# Altium PCB ov_ftdi.PcbDoc (part 2 of 3)
Units mm, origin at the board's own origin, x right, y up, seen from the top; angles counter-clockwise.
Board outline 70.64 x 125.22 mm, 4 copper layers (Top Layer, Ground, Power, Bottom Layer), stack 1.565 mm thick; 150 components, 161 nets, 670 pads, 245 vias.
Unrouted connection lines stored in the file: 2.
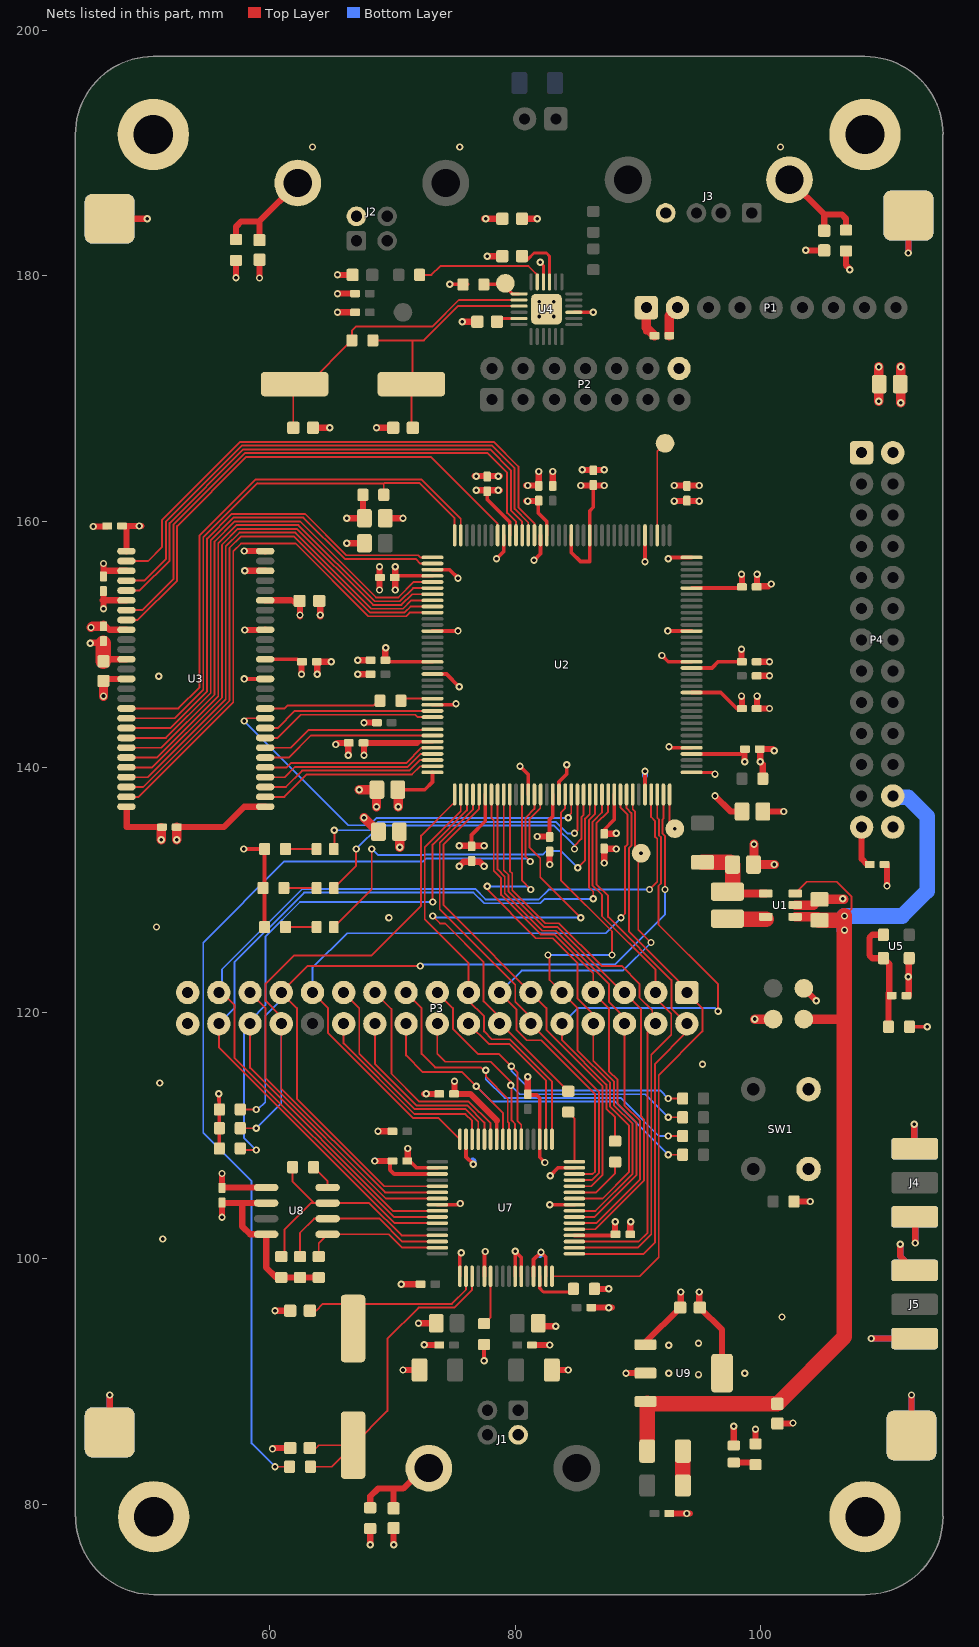
[diagram p4: the nets of this part, all layers, seen from the top]

## Via types
v1: diameter 0.6, hole 0.3, Top Layer to Bottom Layer, 245 vias

## Nets (pads, with @x,y where several pads share a name; then routed paths per layer and width w, separated by ;. In a path a pad name is that pad's centre, name@x,y a point inside that pad or via, vN(x,y) a via of type N, cw(c..) or ccw(c..) an arc to the next point about the centre after c; other vN are vias at no path point) (continued)
+3.3V: C2.2 C4.2 C5.2 C6.2 C7.2 C14.2 C15.2 C17.2 C18.1 C22.2 C23.2 C24.2 C25.2 C26.2 C27.2 C28.2 C31.2 C32.2 C33.2 C34.2 C35.2 C37.2 C38.2 C39.2 C40.2 C42.2 C43.2 C49.2 C51.2 C55.2 C56.2 C57.2 C58.2 C59.2 L3.1 L4.1 P1.1 P4.25 P4.26 R1.1 R6.2 R7.2 R8.2 R9.2 R10.2 R11.2 R12.2 R13.2 R16.1 R18.2 R19.1 R20.1 TP1.1 U2.4 U2.18 U2.20 U2.31 U2.36 U2.42 U2.53 U2.63 U2.76 U2.86 U2.90 U2.103 U2.122 U2.125 U2.129 U2.135 U3.1 U3.3 U3.9 U3.14 U3.27 U3.43 U3.49 U4.9 U4.16 U7.20 U7.31 U7.42 U7.50 U7.56 U8.6 U8.8 U9.2 U9.4 | length 194.1
  Top Layer w0.152: v1(82.042,181.102) 82.3,180.844
  Top Layer w0.254: U4.16@82.3,179.517 82.3,180.844 ; U4.9@84.775,177.042 86.356,177.042 v1(86.36,177.038)
  Top Layer w0.305: C22.2@48.196,159.639 C22.2@48.35,159.485 ; U3.27@48.35,136.793 U3.27@48.374,136.769 ; v1(55.88,113.411) R18.2@55.919,112.141 R19.1@55.919,110.617 R20.1@55.919,108.966 ; v1(57.912,133.35) R6.2@59.602,133.35 R8.2@59.602,127 ; U3.43@59.65,148.793 62.243,148.793 C28.2@62.446,148.59 ; 61.761,153.593 61.938,153.416 ; C31.2@69.434,148.717 69.565,148.586 U2.18@73.27,148.586 ; C5.2@70.446,138.176 72.644,138.176 73.27,138.802 U2.36@73.27,139.586 ; C38.2@70.485,155.586 U2.4@73.27,155.586 ; C57.2@71.412,107.95 71.972,107.39 U7.50@73.673,107.39 ; 72.109,142.086 U2.31@73.27,142.086 ; U2.20@73.27,147.586 74.41,147.586 v1(75.438,146.558) ; U7.56@73.673,104.39 75.434,104.39 v1(75.527,104.483) ; C25.2@76.454,133.569 76.454,133.604 76.454,134.493 77.57,135.609 U2.42@77.57,137.786 ; C34.2@77.724,162.468 77.724,161.798 79.57,159.952 U2.135@79.57,158.886 ; U7.42@78.498,109.715 78.498,111.252 ; C23.2@81.915,161.706 81.88,161.671 81.88,160.69 82.57,160 U2.129@82.57,158.886 ; C32.2@82.769,134.366 C32.2@82.804,134.331 82.804,135.751 83.07,136.017 U2.53@83.07,137.786 ; v1@82.838,106.738 83.49,107.39 U7.31@84.823,107.39 ; U2.125@84.57,158.886 84.57,157.492 85.308,156.754 86.07,156.754 U2.122@86.07,158.886 86.07,160.873 86.36,161.163 86.36,162.941 C59.2@86.36,162.976 ; U7.20@84.823,101.89 C55.2@87.882,101.89 ; C24.2@87.249,134.585 87.249,134.921 88.07,135.742 U2.63@88.07,137.786 ; C55.2@88.073,102.081 C55.2@88.1,102.108 ; U2.90@94.366,148.082 U2.90@94.37,148.086 96.016,148.086 96.52,148.59 C35.2@98.26,148.59 ; U2.76@94.37,141.086 98.322,141.086 98.679,141.443 C42.2@98.714,141.478 ; U2.86@94.37,146.086 96.738,146.086 98.044,144.78 C49.2@98.46,144.78 ; U2.103@94.37,154.586 98.16,154.586 C27.2@98.26,154.686 ; R1.1@112.102,118.872 v1(113.538,118.872)
  Top Layer w0.508: C40.2@46.482,151.676 46.965,151.193 U3.9@48.35,151.193 ; C39.2@46.482,155.54 C39.2@46.482,155.74 ; v1(46.482,156.591) C39.2@46.482,155.74 ; C15.2@46.736,147.193 U3.14@48.35,147.193 ; C22.2@48.196,159.639 v1(49.403,159.639) v1@49.555,159.639 ; U3.3@48.35,155.993 46.735,155.993 C39.2@46.482,155.74 ; U3.1@48.35,157.593 C22.2@48.35,159.485 ; U3.27@48.374,136.769 48.374,135.128 C37.2@51.041,135.128 ; v1(56.134,103.378) C58.2@56.134,104.356 ; C58.2@56.134,104.556 C58.2@56.134,104.356 ; U8.6@59.301,104.521 57.785,104.521 ; U3.49@59.65,153.593 61.761,153.593 ; C14.2@62.446,153.543 62.484,153.505 v1(62.484,152.4) v1@62.484,152.273 ; v1(62.611,147.574) 62.611,148.555 C28.2@62.646,148.59 ; R13.2@64.008,98.464 R12.2@62.484,98.464 R11.2@60.96,98.464 60.54,98.464 59.73,99.274 U8.8@59.73,101.981 58.42,101.981 57.785,102.616 57.785,104.521 ; v1(67.691,140.97) 67.691,141.951 C33.2@67.656,141.986 72.009,141.986 ; C31.2@69.434,148.717 69.434,149.698 v1(69.469,149.733) ; C7.2@69.58,160.274 v1(70.866,160.274) ; v1(70.231,154.432) v1(70.231,156.337) ; C5.2@70.446,138.176 C5.2@70.485,138.137 ; C6.2@70.573,134.747 C6.2@70.612,134.708 ; v1(70.866,90.932) L4.1@72.21,90.932 ; C57.2@71.212,107.95 71.247,107.985 v1(71.247,108.966) ; C56.2@75.022,113.411 75.057,113.446 v1(75.057,114.427) ; C56.2@75.222,113.411 76.339,113.411 78.498,111.252 ; v1(75.438,133.604) 76.454,133.604 v1(77.47,133.604) ; v1(75.527,104.483) v1@75.565,104.521 ; v1(76.835,162.56) v1(78.613,162.56) v1@78.74,162.56 ; C18.1@80.556,184.658 v1(81.788,184.658) ; v1@80.899,161.671 v1(81.026,161.671) C23.2@81.88,161.671 ; v1(81.788,134.366) C32.2@82.769,134.366 ; L3.1@82.984,90.932 v1(84.328,90.932) ; v1(85.344,162.941) 86.36,162.941 v1(87.249,162.941) ; R16.1@86.448,97.536 v1(87.63,97.536) ; C24.2@87.249,134.585 88.205,134.585 v1(88.24,134.62) ; v1(88.138,102.997) 88.138,102.016 C55.2@88.173,101.981 ; v1(89.027,90.678) U9.2@90.608,90.678 ; 90.678,175.476 90.678,175.803 ; v1(92.964,161.671) v1(94.996,161.671) ; v1(94.996,97.282) 94.996,96.05 C17.2@95.034,96.012 96.844,94.202 U9.4@96.844,90.678 ; v1(96.266,137.668) 97.536,136.398 C4.2@98.464,136.398 ; v1(98.425,145.796) 98.46,145.761 C49.2@98.46,144.78 ; v1(98.425,149.606) 98.425,148.625 C35.2@98.46,148.59 ; v1(98.425,155.702) 98.46,155.667 C27.2@98.46,154.686 ; v1(98.679,140.462) C42.2@98.679,141.443 ; R9.2@99.568,84.924 v1(99.568,86.106) ; R10.2@102.704,104.648 v1(104.013,104.648) ; TP1.1@103.5,122 v1(104.5,121) ; P4.25@108.204,135.128 108.204,132.55 C26.2@108.674,132.08 ; C58.2@56.134,104.356 56.299,104.521 57.785,104.521
  Top Layer w0.762: v1(45.466,151.384) 45.558,151.476 C40.2@46.482,151.476 ; v1(46.482,145.796) C15.2@46.482,147.028 ; v1(51.181,134.112) C37.2@51.181,135.068 ; v1(70.485,136.779) C5.2@70.485,138.137 ; v1(70.612,133.477) C6.2@70.612,134.708 ; P1.1@90.678,177.419 90.678,175.803 C43.2@91.348,175.133 ; v1(109.601,169.799) v1(109.601,172.593)
  other v1: 94.925,90.56 92.5,90.664 98.679,90.678 92.5,92.95 94.925,93.1 82.85,106.75
+5V: C10.2 C16.2 L2.1 P4.24 TP3.1 U1.1 U1.3 U9.3 | length 89.4
  Top Layer w0.152: U1.3@102.8,129.728 103.755,130.683 106.194,130.683 107.378,129.5 107.378,128.46 v1(106.807,127.889)
  Top Layer w0.508: U9.3@90.608,88.367 U9.3@90.752,88.223
  Top Layer w0.762: U1.1@102.8,127.828 C10.2@104.675,127.828 ; TP3.1@103.5,119.5 106.807,119.5
  Top Layer w1.27: L2.1@90.752,84.328 U9.3@90.752,88.223 ; U9.3@90.799,88.176 C16.2@101.346,88.176 106.807,93.637 106.807,119.5 v1(106.807,126.746) v1(106.807,127.889) 106.465,127.547 C10.2@104.775,127.547
  Bottom Layer w1.27: v1(106.807,126.746) v1(106.807,127.889) ; v1@106.934,127.889 111.506,127.889 113.538,129.921 113.538,136.012 112.003,137.547 110.865,137.547 P4.24@110.744,137.668
ACBUS0: P3.9 U2.55 U7.26 | length 45.8
  Top Layer w0.152: v1@82.804,124.714 82.804,122.682 P3.9@83.82,121.666 85.09,120.396 85.09,116.94 87.732,114.299 87.732,112.367 89.256,110.843 89.256,107.036 87.11,104.89 U7.26@84.823,104.89 ; U2.55@84.07,137.786 84.07,136.648 83.718,136.296 83.718,130.811 87.884,126.646 v1(87.884,124.714)
  Bottom Layer w0.152: v1(82.677,124.714) v1(87.884,124.714)
ACBUS2: P3.11 U2.41 U7.28 | length 40.2
  Top Layer w0.152: U2.41@77.07,137.786 77.07,136.633 74.168,133.731 74.168,128.778 82.55,120.396 82.55,118.618 87.122,114.046 87.122,106.834 86.178,105.89 U7.28@84.823,105.89
ACBUS3: P3.12 U2.40 U7.29 | length 39.5
  Top Layer w0.152: U2.40@76.57,137.786 76.57,136.564 73.863,133.857 73.863,128.437 80.01,122.29 80.01,120.904 81.28,119.634 P3.12@81.28,119.126 86.817,113.589 86.817,106.96 86.247,106.39 U7.29@84.823,106.39
ACBUS4: P3.13 TP15.1 U2.66 U7.30 | length 47.1
  Top Layer w0.152: P3.13@78.74,121.666 80.101,120.305 80.101,118.624 80.946,117.779 82.119,117.779 86.512,113.386 86.512,107.086 86.316,106.89 U7.30@84.823,106.89 ; U2.66@89.57,137.786 89.57,136.59 89.764,136.397 89.764,133.486 v1(90.25,133) 90.018,132.768 90.018,126.771 v1(91.059,125.73)
  Bottom Layer w0.152: P3.13@78.74,121.666 80.518,123.444 88.773,123.444 v1(91.059,125.73)
ACBUS6: P3.15 U2.38 U7.33 | length 34.4
  Top Layer w0.152: U2.38@75.57,137.786 75.57,136.426 72.644,133.5 72.644,127.635 76.2,124.079 P3.15@76.2,121.666 76.2,120.992 77.47,119.722 77.47,118.491 78.105,117.856 79.579,117.856 82.998,114.437 U7.33@82.998,109.715
ACBUS7: P3.16 U7.34 | length 13
  Top Layer w0.152: P3.16@76.2,119.126 77.851,117.475 79.529,117.475 82.498,114.506 U7.34@82.498,109.715
BCBUS4: P3.29 U7.55 | length 25.5
  Top Layer w0.152: P3.29@58.42,121.666 59.69,120.396 59.69,114.685 69.485,104.89 U7.55@73.673,104.89
BDBUS4: P3.21 U7.43 | length 18.2
  Top Layer w0.152: P3.21@68.58,121.666 69.933,120.313 69.933,115.054 72.211,112.776 76.223,112.776 77.998,111.001 U7.43@77.998,109.715
BDBUS5: P3.22 U7.44 | length 15.5
  Top Layer w0.152: P3.22@68.58,119.126 68.58,115.847 71.956,112.471 76.097,112.471 77.498,111.07 U7.44@77.498,109.715
BDBUS6: P3.23 U7.45 | length 18.9
  Top Layer w0.152: P3.23@66.04,121.666 67.31,120.396 67.31,116.686 71.83,112.166 75.971,112.166 76.998,111.139 U7.45@76.998,109.715
BDBUS7: P3.24 U7.46 | length 16.2
  Top Layer w0.152: P3.24@66.04,119.126 66.04,117.525 71.805,111.76 75.946,111.76 76.498,111.208 U7.46@76.498,109.715
CCLK: P3.10 R22.2 U2.70 | length 44.3
  Top Layer w0.152: P3.10@83.82,119.126 83.82,117.779 87.427,114.172 87.427,112.217 88.138,111.506 R22.2@88.138,109.816 ; U2.70@91.57,137.786 91.57,135.884 91.705,135.749 91.705,134.463 91.875,134.293 91.875,130.56 91.669,130.354 91.669,127.193 96.52,122.341 v1(96.52,120.142)
  Bottom Layer w0.152: P3.10@83.82,119.126 85.09,120.396 96.266,120.396 v1(96.52,120.142)
CLKOUT: P3.14 R23.2 U2.51 | length 43.4
  Top Layer w0.152: v1(73.279,127.889) 73.887,127.281 74.295,127.281 77.433,124.143 77.433,120.941 78.74,119.634 P3.14@78.74,119.126 78.828,119.126 R23.2@84.328,113.626 ; U2.51@82.042,137.786 82.042,136.652 81.153,135.763 81.153,133.477 82.042,132.588 82.042,131.064 v1(85.344,127.762)
  Bottom Layer w0.152: v1(73.279,127.889) 73.406,127.762 v1(85.344,127.762)
CSI_B: P3.25 U2.64 U7.48 | length 57.5
  Top Layer w0.152: P3.25@63.5,121.666 64.77,120.396 64.77,118.364 71.679,111.455 73.758,111.455 U7.48@75.498,109.715 ; U2.64@88.57,137.786 88.57,136.728 89.154,136.144 89.154,133.736 88.955,133.537 88.955,128.096 v1(88.621,127.762)
  Bottom Layer w0.152: P3.25@63.5,121.666 63.5,123.675 66.317,126.492 87.376,126.492 88.621,127.737 v1(88.621,127.762)
D0: P3.1 U2.65 U7.16 | length 51.2
  Top Layer w0.152: U7.16@82.998,98.565 90.157,98.565 91.694,100.102 91.694,114.935 95.25,118.491 95.25,120.396 P3.1@93.98,121.666 93.98,121.92 89.259,126.641 89.259,133.41 89.459,133.61 89.459,136.27 89.07,136.659 U2.65@89.07,137.786
D1: P3.2 U2.62 U7.17 | length 47.9
  Top Layer w0.152: U7.17@84.823,100.39 90.457,100.39 91.389,101.322 91.389,115.861 93.98,118.452 P3.2@93.98,119.126 93.976,119.126 92.723,120.379 92.723,122.669 87.57,127.822 87.57,129.54 86.614,130.496 86.614,135.442 87.57,136.398 U2.62@87.57,137.786
D2: P3.3 U2.61 U7.18 | length 46.2
  Top Layer w0.152: U7.18@84.823,100.89 89.982,100.89 91.084,101.992 91.084,116.584 92.71,118.21 92.71,119.923 91.44,121.193 91.44,123.521 87.07,127.891 87.07,129.609 86.309,130.37 86.309,135.568 87.07,136.329 U2.61@87.07,137.786
D3: P3.4 U2.46 U7.19 | length 48.7
  Top Layer w0.152: U2.46@79.57,137.786 79.57,131.55 79.765,131.355 79.765,129.989 82.449,127.305 83.562,127.305 87.041,123.825 88.673,123.825 90.119,122.379 90.119,121.256 91.164,120.211 91.164,119.402 P3.4@91.44,119.126 90.78,118.466 90.78,102.118 90.041,101.379 U7.19@84.834,101.379
D4: P3.5 U2.45 U7.21 | length 44.2
  Top Layer w0.152: U2.45@79.07,137.786 79.07,131.619 79.46,131.229 79.46,129.862 82.323,127 83.435,127 88.769,121.666 P3.5@88.9,121.666 90.25,120.316 90.25,111.572 90.475,111.348 90.475,106.35 86.515,102.39 U7.21@84.823,102.39
D5: P3.6 U2.44 U7.22 | length 43.6
  Top Layer w0.152: U2.44@78.57,137.786 78.57,131.688 79.156,131.103 79.156,129.736 82.197,126.695 83.309,126.695 87.63,122.374 87.63,120.904 88.9,119.634 P3.6@88.9,119.126 88.9,112.491 90.17,111.221 90.17,106.476 86.584,102.89 U7.22@84.823,102.89
D6: P3.7 U2.43 U7.23 | length 43
  Top Layer w0.152: U2.43@78.07,137.786 78.07,135.89 78.255,135.705 78.255,131.572 78.851,130.976 78.851,129.61 82.07,126.39 83.183,126.39 86.36,123.213 P3.7@86.36,121.666 87.63,120.396 87.63,115.262 88.341,114.551 88.341,112.619 89.865,111.095 89.865,106.783 86.472,103.39 U7.23@84.823,103.39
D7: P3.8 U2.48 U7.24 | length 47.1
  Top Layer w0.152: v1@77.47,130.302 77.597,130.175 81.686,126.086 83.057,126.086 85.09,124.052 85.09,121.158 86.36,119.888 P3.8@86.36,119.126 86.36,116.101 88.036,114.425 88.036,112.493 89.56,110.969 89.56,106.909 86.541,103.89 U7.24@84.823,103.89 ; v1@77.597,130.429 v1@77.724,130.556 ; U2.48@80.57,137.786 80.543,137.759 80.543,130.785 v1(81.28,130.048)
  Bottom Layer w0.152: v1(77.724,130.302) 81.026,130.302 v1(81.28,130.048)
DONE: P3.27 R18.1 U2.71 U7.53 | length 78.9
  Top Layer w0.152: R18.1@57.619,112.141 v1@58.674,112.141 ; v1(72.263,123.825) 63.119,123.825 P3.27@60.96,121.666 62.23,120.396 62.23,113.007 69.347,105.89 U7.53@73.673,105.89 ; U2.71@92.07,137.786 92.07,135.809 92.009,135.748 92.009,134.59 92.202,134.397 v1(92.202,130.048)
  Bottom Layer w0.152: v1(58.928,112.141) 59.055,112.141 59.656,112.742 59.656,119.78 60.96,121.083 P3.27@60.96,121.666 ; v1@72.136,123.952 88.138,123.952 92.202,128.016 v1(92.202,130.048)
EECLK: R12.1 U7.62 U8.2 | length 14.4
  Top Layer w0.152: R12.1@62.484,100.164 62.484,102.108 63.627,103.251 U8.2@64.73,103.251 68.961,103.251 70.822,101.39 U7.62@73.673,101.39
EECS: R13.1 U7.63 U8.1 | length 11.5
  Top Layer w0.152: R13.1@64.008,100.164 64.008,101.259 U8.1@64.73,101.981 69.723,101.981 70.814,100.89 U7.63@73.673,100.89
EEDATA: R11.1 R17.2 U7.61 U8.3 | length 20.3
  Top Layer w0.152: R11.1@61.214,100.164 61.214,102.362 63.373,104.521 63.627,104.521 ; R17.2@61.888,107.442 61.888,106.26 63.627,104.521 ; U7.61@73.673,101.89 70.753,101.89 68.122,104.521 U8.3@64.73,104.521 63.627,104.521
FTDI_TCK: NT2.1 P3.17 U7.38 | length 31
  Top Layer w0.152: P3.17@73.66,121.666 74.93,120.396 74.93,118.718 76.998,116.65 78.707,116.65 v1(79.695,115.662) 80.183,115.173 80.183,111.206 80.498,110.891 U7.38@80.498,109.715 ; v1(92.456,113.03) NT2.1@93.638,113.03
  Bottom Layer w0.152: v1(79.695,115.662) 79.695,115.277 81.281,113.69 91.796,113.69 v1(92.456,113.03)
FTDI_TDI: NT3.1 P3.18 U7.39 | length 29.3
  Top Layer w0.152: P3.18@73.66,119.126 73.66,116.688 74.323,116.025 78.031,116.025 78.638,115.418 79.248,114.808 79.65,114.406 v1(79.65,114.1) 79.705,114.045 79.705,111.253 79.998,110.96 U7.39@79.998,109.715 ; v1(92.456,111.506) NT3.1@93.638,111.506
  Bottom Layer w0.152: v1(79.65,114.1) 80.364,113.386 90.576,113.386 v1(92.456,111.506)
FTDI_TDO: NT4.1 P3.19 U7.40 | length 36.4
  Top Layer w0.152: P3.19@71.12,121.666 72.39,120.396 72.39,116.663 73.483,115.57 77.216,115.57 77.452,115.334 v1(77.606,115.334) 77.631,115.309 77.631,114.801 79.4,113.031 79.4,111.125 79.498,111.027 U7.40@79.498,109.715 ; v1(92.456,109.982) NT4.1@93.638,109.982
  Bottom Layer w0.152: v1(77.606,115.334) 77.606,114.619 79.144,113.081 88.595,113.081 91.694,109.982 v1(92.456,109.982)
FTDI_TMS: NT5.1 P3.20 U7.41 | length 33.6
  Top Layer w0.152: P3.20@71.12,119.126 71.12,116.549 72.48,115.189 75.675,115.189 v1(76.843,114.021) 78.998,111.866 U7.41@78.998,109.715 ; v1(92.456,108.458) NT5.1@93.638,108.458
  Bottom Layer w0.152: v1(76.843,114.021) 78.088,112.776 88.138,112.776 v1(92.456,108.458)
GND: C1.1 C2.1 C3.1 C4.1 C5.1 C6.1 C7.1 C8.1 C9.1 C10.1 C11.2 C12.2 C13.1 C14.1 C15.1 C16.1 C17.1 C18.2 C19.1 C20.1 C21.1 C22.1 C23.1 C24.1 C25.1 C26.1 C27.1 C28.1 C29.1 C30.1 C31.1 C32.1 C33.1 C34.1 C35.1 C36.1 C37.1 C38.1 C39.1 C40.1 C41.1 C42.1 C43.1 C44.1 C45.2 C46.1 C47.1 C48.1 C49.1 C50.1 C51.1 C52.1 C53.1 C54.1 C55.1 C56.1 C57.1 C58.1 C59.1 C60.1 C61.1 C62.1 C63.1 C64.1 H1.1@50.546,191.516 H2.1@108.483,191.516 H3.1@108.483,78.994 H4.1@50.571,78.994 J1.4 J2.4 J3.4 J4.2 J4.3 J4.4 J4.5 J5.2 J5.3 J5.4 J5.5 LD4.C P1.2 P2.14 P3.33 P3.34 P4.1 P4.2 R2.1 R15.2 R21.1 R25.2 R27.2 R28.2 R29.2 SW1.3 SW1.4 TP4.1 TP5.1 TP6.1 TP7.1 TP8.1 TP9.1 TP10.1 TP11.1 TP12.1 U1.2 U2.3 U2.13 U2.25 U2.49 U2.54 U2.68 U2.73 U2.77 U2.91 U2.96 U2.108 U2.113 U2.130 U2.136 U3.6 U3.12 U3.28 U3.41 U3.46 U3.52 U3.54 U4.25 U5.2 U7.1 U7.5 U7.10 U7.11 U7.13 U7.15 U7.25 U7.35 U7.47 U7.51 U8.5 U9.1 | length 246
  Top Layer w0.152: U4.25@82.55,178.054 U4.25@83.3,177.304
  Top Layer w0.254: U2.73@94.37,139.586 96.126,139.586 v1(96.266,139.446)
  Top Layer w0.305: v1(57.937,147.193) U3.41@59.65,147.193 ; C57.1@69.812,107.95 69.812,107.226 70.148,106.89 U7.51@73.673,106.89 ; U2.25@73.27,145.086 75.109,145.086 v1(75.184,145.161) ; U2.13@73.27,151.086 73.284,151.1 v1(75.35,151.1) ; U2.3@73.27,156.086 74.664,156.086 v1(75.35,155.4) ; v1(74.676,179.324) R2.1@76.112,179.324 ; U7.1@75.498,98.565 75.498,100.293 75.6,100.395 v1(75.6,100.475) ; U7.47@75.998,109.715 75.998,108.277 v1(76.6,107.675) ; v1(77.47,91.694) R15.2@77.47,93.003 ; U7.5@77.498,98.565 77.498,100.498 v1(77.575,100.575) ; v1(78.486,156.972) 79.07,157.556 U2.136@79.07,158.886 ; U7.10@79.998,98.565 80,98.567 v1(80,100.6) 80.498,100.102 U7.11@80.498,98.565 ; v1(80.391,140.081) 81.07,139.402 U2.49@81.07,137.786 ; C54.1@81.28,113.322 81.75,113.322 81.998,113.074 U7.35@81.998,109.715 81.998,108.248 v1(82.423,107.823) ; U7.13@81.498,98.565 81.498,99.923 v1(82.1,100.525) 82.498,100.127 U7.15@82.498,98.565 ; v1(81.534,156.845) 82.07,157.381 U2.130@82.07,158.886 ; v1(82.808,104.39) U7.25@84.823,104.39 ; U2.54@83.57,137.786 83.57,138.815 84.201,139.446 v1(84.201,140.208) ; U2.68@90.57,137.786 v1(90.57,139.681) ; v1(90.57,156.737) U2.113@90.57,158.886 ; v1(91.948,149.098) 92.46,148.586 U2.91@94.37,148.586 ; v1(92.425,151.1) 94.356,151.1 U2.96@94.37,151.086 ; v1(92.456,156.972) 92.57,157.086 U2.108@94.37,157.086 ; v1(92.525,141.675) 92.605,141.675 92.694,141.586 U2.77@94.37,141.586 ; U5.2@112.052,124.43 U5.2@112.082,124.46
  Top Layer w0.508: v1@45.43,150.13 46.436,150.13 46.482,150.176 C40.1@46.482,150.276 ; v1(45.65,159.6) 46.757,159.6 C22.1@46.796,159.639 ; 46.419,153.593 46.482,153.593 ; C15.1@46.482,148.793 U3.12@48.35,148.793 ; v1(46.482,152.908) 46.482,153.593 ; C39.1@46.482,154.14 46.482,153.593 ; TP5.1@46.99,85.852 v1(46.99,88.9) ; TP6.1@46.99,184.658 v1(50.038,184.658) ; U3.6@48.35,153.593 46.482,153.593 ; C37.1@52.641,135.128 56.286,135.128 57.951,136.793 U3.28@59.65,136.793 ; C58.1@56.134,105.756 v1(56.134,106.934) ; C58.1@56.299,105.791 U8.5@59.73,105.791 ; v1(57.277,179.857) R27.2@57.277,181.343 ; v1(57.937,157.607) U3.54@59.65,157.593 ; v1(57.974,155.993) U3.52@59.65,155.993 ; v1(57.975,151.175) 59.632,151.175 U3.46@59.65,151.193 ; v1(59.182,179.832) C44.1@59.182,181.318 ; v1(60.25,84.507) 60.319,84.507 60.394,84.582 C61.1@61.684,84.582 ; v1(60.452,95.758) C60.1@61.684,95.758 ; C63.1@63.538,167.64 v1(64.897,167.64) ; C28.1@63.846,148.59 63.881,148.555 v1(63.881,147.574) ; C28.1@64.046,148.59 v1(65.024,148.59) ; v1@64.135,152.273 v1(64.135,152.4) C14.1@64.135,153.378 ; v1(65.405,141.859) 65.532,141.986 C33.1@66.456,141.986 66.421,141.951 v1(66.421,140.97) ; v1(65.532,177.038) C45.2@66.764,177.038 ; v1(65.532,178.562) C41.1@66.764,178.562 ; v1(65.532,180.086) C13.1@66.764,180.086 ; v1(66.294,158.242) C3.1@67.58,158.242 ; v1(66.294,160.274) C7.1@67.58,160.274 ; v1(67.183,148.717) C31.1@68.234,148.717 ; v1@67.31,147.574 C20.1@68.234,147.574 C20.1@68.288,147.574 ; R21.1@67.603,162.179 67.603,160.401 C7.1@67.73,160.274 ; v1(67.691,143.637) C21.1@68.742,143.637 C21.1@68.923,143.637 ; v1(68.199,76.708) R29.2@68.199,78.017 ; v1(68.58,107.95) C57.1@69.812,107.95 ; C5.1@68.707,138.137 C5.1@68.746,138.176 ; v1(68.707,167.64) C62.1@70.066,167.64 ; v1(68.834,110.363) C53.1@70.012,110.363 ; C6.1@68.834,134.747 C6.1@68.873,134.747 ; v1(68.961,154.432) v1(68.961,156.337) ; v1(70.104,76.708) C64.1@70.104,78.067 ; v1(70.739,97.917) C36.1@72.098,97.917 ; v1@72.39,94.742 C9.1@73.572,94.742 C9.1@73.622,94.742 ; v1@72.59,113.411 v1(72.771,113.411) C56.1@73.822,113.411 ; v1(72.6,92.975) 73.611,92.975 C47.1@73.622,92.964 ; v1(75.438,131.953) 75.8,132.315 76.408,132.315 C25.1@76.454,132.361 ; v1(75.692,176.276) C11.2@76.924,176.276 ; v1@76.708,163.703 v1(76.835,163.703) v1(78.613,163.703) v1@78.74,163.703 ; v1(77.47,131.953) 77.108,132.315 76.5,132.315 C25.1@76.454,132.361 ; v1@77.47,184.658 v1(77.597,184.658) C18.2@78.956,184.658 ; v1(77.724,181.61) C12.2@78.956,181.61 ; v1@80.899,162.941 v1(81.026,162.941) 81.88,162.941 C23.1@81.915,162.906 v1(81.915,164.084) ; C54.1@81.026,113.576 v1(81.026,114.808) ; C50.1@81.572,92.964 v1(82.804,92.964) ; C8.1@81.572,94.488 v1@83.058,94.488 ; v1(82.804,132.08) C32.1@82.804,133.131 ; C19.1@83.058,163.106 v1(83.058,164.084) ; v1(85.471,164.211) v1(87.249,164.211) ; C52.1@86.398,96.012 v1(87.63,96.012) v1@87.884,96.012 ; v1(87.249,132.207) C24.1@87.249,133.385 87.267,133.368 88.222,133.368 v1(88.24,133.35) ; C55.1@89.373,101.981 89.373,102.962 v1(89.408,102.997) ; U9.1@90.608,92.989 90.608,93.186 C17.1@93.434,96.012 93.472,96.05 v1(93.472,97.282) ; C46.1@92.748,79.248 v1(93.98,79.248) v1@94.234,79.248 ; v1(92.964,162.941) v1(94.996,162.941) ; v1(97.79,86.36) 97.8,86.35 LD4.C@97.8,84.794 ; C29.1@99.66,147.447 v1(100.711,147.447) ; C35.1@99.66,148.59 v1(100.711,148.59) ; C27.1@99.66,154.686 99.695,154.721 v1(99.695,155.702) ; v1(99.695,145.796) 99.695,144.815 C49.1@99.66,144.78 v1(100.711,144.78) ; C27.1@99.806,154.686 99.806,154.732 100.608,154.732 100.793,154.917 v1(100.861,154.917) ; C4.1@100.164,136.398 v1(101.854,136.398) ; R25.2@100.164,139.065 100.164,140.247 v1(99.949,140.462) 99.949,141.443 C42.1@99.914,141.478 100.965,141.478 v1(101.092,141.351) ; C16.1@101.346,86.576 102.578,86.576 v1(102.616,86.614) ; v1(103.67,182.08) C48.1@105.156,182.08 ; R28.2@106.934,182.105 106.934,180.885 107.25,180.569 v1(107.25,180.5) ; v1(108.99,93.496) J5.2@112.522,93.496 ; v1(110.274,130.34) C26.1@110.274,132.08 ; v1(111.35,101.175) 111.35,100.208 J5.3@112.522,99.036 ; v1(112.014,181.864) TP8.1@112.014,184.912 ; C30.1@112.052,121.412 U5.2@112.052,124.43 ; TP7.1@112.268,85.598 v1(112.268,88.9) ; v1(112.5,110.95) 112.5,108.964 J4.3@112.522,108.942 ; J4.2@112.522,103.402 112.575,103.349 v1(112.575,101.275) ; C25.1@76.454,132.361 76.454,132.475 C25.1@76.454,132.361
  Top Layer w0.762: v1(52.451,134.112) C37.1@52.451,135.118 ; v1(67.31,138.176) C5.1@68.596,138.176 ; v1(67.691,135.89) C6.1@68.834,134.747 ; v1(68.707,136.779) C5.1@68.707,138.137 ; C43.1@92.548,175.133 92.548,176.749 P1.2@93.218,177.419 ; v1(99.441,133.731) 99.441,132.119 C1.1@99.402,132.08 v1(101.092,132.08) ; v1(99.5,119.5) TP4.1@100.972,119.5 ; TP4.1@101,119.5 TP4.1@101.015,119.457 ; U1.2@102.8,128.778 104.306,128.778 C10.1@104.775,129.247 v1@106.768,129.247 ; v1(111.379,169.672) v1(111.379,172.593)
  Top Layer w1.27: C15.1@46.482,148.628 46.482,148.793 C40.1@46.482,150.076
  Bottom Layer w0.305: v1(74.676,179.324) v1@74.93,179.324
  Bottom Layer w0.508: TP9.1@46.99,85.852 v1(46.99,88.9) ; v1@57.937,156.03 v1(57.974,155.993) ; J2.4@66.901,184.856 J2.4@67.076,184.856 ; v1(68.58,107.95) v1@68.605,107.975 ; 76.556,107.975 76.6,107.931 v1(76.6,107.675) ; J1.4@80.244,85.654 J1.4@80.419,85.654 ; v1@82.03,100.318 82.1,100.388 v1(82.1,100.525) ; 90.57,139.338 v1(90.57,139.681) ; v1(108.99,93.496) J5.4@112.522,93.496 ; v1(111.35,101.175) 111.35,100.208 J5.5@112.522,99.036 ; v1(112.014,181.864) TP12.1@112.014,184.912 ; TP10.1@112.268,85.598 v1(112.268,88.9) ; v1(112.5,110.95) 112.5,108.964 J4.5@112.522,108.942 ; J4.4@112.522,103.402 112.575,103.349 v1(112.575,101.275)
  other v1: 83.312,94.488 72.136,94.742 101.727,95.25 51.308,101.6 51.054,114.3 95.25,115.824 112.014,122.936 50.8,127 69.723,127.762 106.68,129.286 50.975,147.4 67.183,147.574 45.4,150.1 81.95,176.692 83.15,176.692 81.95,177.892 83.15,177.892 63.5,190.5 75.5,190.5 101.6,190.5
INIT_B: P3.30 R20.2 U2.39 U7.57 | length 68.2
  Top Layer w0.152: R20.2@57.619,108.966 57.746,108.839 v1(58.928,108.839) ; P3.30@58.42,119.126 58.42,115.524 70.054,103.89 U7.57@73.673,103.89 ; v1(73.279,129.032) 73.279,133.704 76.07,136.495 U2.39@76.07,137.786
  Bottom Layer w0.152: v1(58.928,108.839) 57.912,109.855 57.912,118.618 P3.30@58.42,119.126 58.42,119.38 59.69,120.65 59.69,126.238 62.484,129.032 v1(73.279,129.032)
J1_shield: C64.2 J1.6 R29.1 | length 8.3
  Top Layer w0.508: R29.1@68.199,79.717 68.199,80.645 68.834,81.28 70.231,81.28 ; C64.2@70.104,79.667 70.104,81.153 70.231,81.28 ; J1.6@72.974,82.944 72.537,82.944 70.873,81.28 70.231,81.28
J2_SHIELD: C44.2 J2.5 R27.1 | length 9.1
  Top Layer w0.508: R27.1@57.277,182.968 57.277,184.023 57.696,184.442 59.182,184.442 ; C44.2@59.182,182.918 59.182,184.442 ; J2.5@62.306,187.566 59.182,184.442
J3_SHIELD: C48.2 J3.6 R28.1 | length 8.2
  Top Layer w0.508: J3.6@102.328,187.84 105.156,185.012 ; C48.2@105.156,183.68 105.156,185.012 ; R28.1@106.934,183.73 106.934,184.658 106.58,185.012 105.156,185.012
LED0: LD1.C U2.57 | length 25
  Top Layer w0.152: LD1.C@65.236,133.34 65.278,133.382 v1(65.278,134.874) ; v1(84.836,134.62) 85.07,134.854 U2.57@85.07,137.786
  Bottom Layer w0.152: v1(65.278,134.874) 68.149,134.874 68.835,135.56 83.311,135.56 84.251,134.62 v1(84.836,134.62)
LED1: LD2.C U2.58 | length 27.7
  Top Layer w0.152: LD2.C@65.236,130.165 67.056,131.985 v1(67.056,133.35) ; v1@84.836,133.604 85.395,134.163 85.395,135.947 85.57,136.122 U2.58@85.57,137.786
  Bottom Layer w0.152: v1(67.056,133.35) 68.961,135.255 83.185,135.255 v1@84.836,133.604
  other v1: 84.836,133.35
LED2: LD3.C U2.59 | length 31.7
  Top Layer w0.152: LD3.C@65.236,126.99 68.326,130.08 v1(68.326,133.35) ; v1(85.09,131.826) 85.7,132.436 85.7,135.821 86.07,136.191 U2.59@86.07,137.786
  Bottom Layer w0.152: v1(68.326,133.35) 68.809,132.867 72.619,132.867 72.645,132.893 82.247,132.893 82.551,133.198 83.718,133.198 v1(85.09,131.826)
LOCAL1.8V: C11.1 U4.23 | length 1.8
  Top Layer w0.254: C11.1@78.486,176.542 U4.23@80.325,176.542
LOCAL3.3V: C12.1 U4.15 | length 4.7
  Top Layer w0.254: C12.1@80.556,181.356 81.026,181.356 81.534,181.864 82.55,181.864 82.8,181.614 U4.15@82.8,179.517
M0: P3.31 U2.69 U7.58 | length 76.3
  Top Layer w0.152: P3.31@55.88,121.666 56.134,121.666 57.15,120.65 57.15,116.363 70.123,103.39 U7.58@73.673,103.39 ; v1(90.932,130.048) 91.57,130.686 91.57,134.167 91.4,134.337 91.4,135.623 91.07,135.953 U2.69@91.07,137.786
  Bottom Layer w0.152: P3.31@55.88,121.666 56.134,121.92 56.134,123.544 62.689,130.099 76.734,130.099 77.598,129.235 81.914,129.235 82.727,130.048 v1(90.932,130.048)
M1: P3.32 U2.60 U7.59 | length 72.1
  Top Layer w0.152: P3.32@55.88,119.126 55.88,117.202 70.192,102.89 U7.59@73.673,102.89 ; v1(86.36,129.286) 86.36,129.888 86.004,130.243 86.004,135.695 86.512,136.203 86.512,137.728 U2.60@86.57,137.786
  Bottom Layer w0.152: P3.32@55.88,119.126 57.15,120.396 57.15,124.129 62.815,129.794 76.608,129.794 77.471,128.93 82.041,128.93 82.396,129.286 v1(86.36,129.286)
NetC1_2: C1.2 L1.2 L5.2 U1.4 | length 8.1
  Top Layer w0.508: L1.2@97.282,129.878 L1.2@97.432,129.728
  Top Layer w0.635: L1.2@97.432,129.728 U1.4@100.4,129.728
  Top Layer w1.27: L5.2@95.25,132.258 97.524,132.258 C1.2@97.702,132.08 97.702,130.298 L1.2@97.282,129.878
NetC30_2: C30.2 R1.2 U5.1 U5.4 | length 9.7
  Top Layer w0.152: C30.2@110.402,121.616 C30.2@110.452,121.666
  Top Layer w0.508: U5.4@109.982,126.36 109.088,126.36 108.839,126.111 108.839,124.714 109.093,124.46 U5.1@109.982,124.46 110.452,123.99 C30.2@110.452,121.666 ; R1.2@110.402,118.872 C30.2@110.402,121.616
NetC62_2: C62.2 R24.1 U4.21 Y1.2 | length 20.3
  Top Layer w0.152: R24.1@68.414,174.752 71.628,174.752 ; C62.2@71.666,167.64 71.552,167.754 Y1.2@71.552,171.196 71.641,171.285 71.641,174.739 71.628,174.752 ; U4.21@80.325,177.542 80.304,177.563 75.378,177.563 72.567,174.752 71.628,174.752
NetC63_2: C63.2 R24.2 U4.20 Y1.1 | length 25.2
  Top Layer w0.152: C63.2@61.938,167.64 61.938,171.082 Y1.1@62.052,171.196 63.158,171.196 R24.2@66.714,174.752 66.714,175.553 67.056,175.895 73.279,175.895 75.426,178.042 U4.20@80.325,178.042
NetF1_2: F1.2 L2.2 | length 2.8
  Top Layer w1.27: F1.2@93.652,81.534 L2.2@93.652,84.328
NetL1_1: L1.1 U1.5 | length 3.2
  Top Layer w0.508: L1.1@97.282,127.678 L1.1@97.432,127.828
  Top Layer w1.27: L1.1@97.489,127.635 U1.5@100.457,127.635
NetLD1_A: LD1.A R6.1 | length 2.5
  Top Layer w0.152: R6.1@61.302,133.35 LD1.A@63.836,133.35
NetLD2_A: LD2.A R7.1 | length 2.7
  Top Layer w0.152: R7.1@61.175,130.175 63.826,130.175 LD2.A@63.836,130.165
NetLD3_A: LD3.A R8.1 | length 2.5
  Top Layer w0.152: R8.1@61.302,127 63.826,127 LD3.A@63.836,126.99
NetLD4_A: LD4.A R9.1 | length 1.8
  Top Layer w0.508: LD4.A@97.8,83.394 99.398,83.394 R9.1@99.568,83.224
NetNT1_2: NT1.2 U3.38 | length 9.7
  Top Layer w0.152: U3.38@59.65,144.793 61.227,144.793 61.468,145.034 68.492,145.034 NT1.2@69,145.542
NetR2_2: R2.2 TP14.1 U4.19 | length 2.8
  Top Layer w0.254: R2.2@77.812,179.324 78.994,179.324 79.776,178.542 U4.19@80.325,178.542
NetR3_2: R3.2 U2.50 | length 81.7
  Top Layer w0.152: v1(60.452,83.058) R3.2@61.634,83.058 ; v1(81.229,132.334) 80.848,132.715 80.848,135.889 81.57,136.611 U2.50@81.57,137.786
  Bottom Layer w0.152: v1(60.452,83.058) 58.547,84.963 58.547,106.299 54.61,110.236 54.61,125.73 61.214,132.334 72.517,132.334 72.771,132.588 80.975,132.588 v1(81.229,132.334)
NetR14_1: R14.1 U4.17 | length 10.7
  Top Layer w0.152: R14.1@72.224,180.086 73.186,180.086 73.905,180.805 81.087,180.805 81.654,180.238 81.654,180.23 81.8,180.084 U4.17@81.8,179.517
NetR15_1: R15.1 U7.6 | length 4.1
  Top Layer w0.152: R15.1@77.47,94.703 77.998,95.231 U7.6@77.998,98.565
NetR16_2: R16.2 U7.14 | length 4
  Top Layer w0.254: U7.14@81.998,98.565 81.998,97.58 82.296,97.282 84.494,97.282 R16.2@84.748,97.536
NetR17_1: R17.1 U8.4 | length 2.1
  Top Layer w0.152: R17.1@63.588,107.442 64.73,106.3 U8.4@64.73,105.791
NetR22_1: R22.1 U7.27 | length 5
  Top Layer w0.152: U7.27@84.823,105.39 86.594,105.39 88.138,106.934 88.138,107.608 R22.1@88.392,107.862
NetR23_1: R23.1 U7.32 | length 4.2
  Top Layer w0.152: R23.1@84.328,111.926 84.823,111.431 U7.32@84.823,107.89
NetTP16_1: TP16.1 U2.111 | length 7.7
  Top Layer w0.152: U2.111@91.57,158.886 91.57,165.738 TP16.1@92.202,166.37
NetTP17_1: TP17.1 U2.72 | length 3.1
  Top Layer w0.152: U2.72@92.57,137.786 92.57,135.522 93.092,135 v1(93,135)
OSCI: C60.2 U7.2 Y2.1 | length 14.5
  Top Layer w0.152: C60.2@63.284,95.758 63.792,95.758 64.351,96.317 66.802,96.317 74.854,96.317 75.998,97.461 U7.2@75.998,98.565
OSCO: C61.2 R3.1 U7.3 Y2.2 | length 27.3
  Top Layer w0.152: C61.2@63.284,84.582 63.792,84.582 64.02,84.81 Y2.2@66.802,84.81 ; R3.1@63.334,83.058 65.05,83.058 Y2.2@66.802,84.81 ; U7.3@76.498,98.565 76.498,97.453 75.057,96.012 72.136,96.012 69.596,93.472 69.596,87.604 Y2.2@66.802,84.81
PROG: P3.28 R19.2 U2.37 U7.54 | length 61.4
  Top Layer w0.152: R19.2@57.619,110.617 v1(58.928,110.617) ; U7.54@73.673,105.39 69.416,105.39 60.96,113.846 P3.28@60.96,119.126 60.96,119.709 59.69,120.979 59.69,122.39 61.975,124.675 68.287,124.675 72.339,128.727 72.339,134.442 75.07,137.173 U2.37@75.07,137.786
  Bottom Layer w0.152: v1(58.928,110.617) 60.96,112.649 P3.28@60.96,119.126
RAM_\C\A\S: U2.143 U3.17 | length 44.9
  Top Layer w0.152: U3.17@48.35,144.793 52.591,144.793 54.305,146.507 54.305,158.87 58.874,163.439 72.354,163.439 75.57,160.223 U2.143@75.57,158.886
RAM_\C\S\0: U2.1 U3.19 | length 40.9
  Top Layer w0.152: U3.19@48.35,143.193 51.936,143.193 54.915,146.172 54.915,158.618 56.927,160.63 62.89,160.63 66.257,157.263 72.099,157.263 72.276,157.086 U2.1@73.27,157.086
RAM_\R\A\S_HSWAPEN: R21.2 U2.144 U3.18 | length 45.5
  Top Layer w0.152: U3.18@48.35,143.993 52.299,143.993 54.61,146.304 54.61,158.744 59,163.134 59.039,163.095 69.303,163.095 ; R21.2@69.303,162.179 69.303,163.095 ; U2.144@75.07,158.886 75.07,160.292 72.227,163.134 69.342,163.134 69.303,163.095
RAM_A0: U2.7 U3.23 | length 43.2
  Top Layer w0.152: U3.23@48.35,139.993 50.46,139.993 56.134,145.667 56.134,158.113 57.432,159.41 62.231,159.41 68.429,153.213 70.744,153.213 71.617,154.086 U2.7@73.27,154.086
RAM_A1: U2.8 U3.24 | length 43.3
  Top Layer w0.152: U3.24@48.35,139.193 50.091,139.193 56.439,145.541 56.439,157.987 57.558,159.106 62.105,159.106 68.303,152.908 70.87,152.908 71.548,153.586 U2.8@73.27,153.586
RAM_A2: U2.9 U3.25 | length 43.4
  Top Layer w0.152: U3.25@48.35,138.393 49.722,138.393 56.744,145.414 56.744,157.86 57.684,158.801 61.979,158.801 68.177,152.603 70.996,152.603 71.479,153.086 U2.9@73.27,153.086
RAM_A3: U2.10 U3.26 | length 43.2
  Top Layer w0.152: U3.26@48.35,137.593 49.353,137.593 57.048,145.288 57.048,157.58 57.685,158.217 62.132,158.217 68.05,152.298 71.123,152.298 71.41,152.586 U2.10@73.27,152.586
RAM_A4: U2.35 U3.29 | length 14.7
  Top Layer w0.152: U3.29@59.65,137.593 61.214,137.593 63.042,139.421 71.603,139.421 72.268,140.086 U2.35@73.27,140.086
RAM_A5: U2.34 U3.30 | length 14.5
  Top Layer w0.152: U3.30@59.65,138.393 61.329,138.393 62.662,139.725 71.373,139.725 72.233,140.586 U2.34@73.27,140.586
RAM_A6: U2.33 U3.31 | length 14.4
  Top Layer w0.152: U3.31@59.65,139.193 61.24,139.193 62.078,140.03 71.246,140.03 72.302,141.086 U2.33@73.27,141.086
RAM_A7: U2.32 U3.32 | length 14.3
  Top Layer w0.152: U3.32@59.65,139.993 61.405,139.993 61.747,140.335 71.12,140.335 72.371,141.586 U2.32@73.27,141.586
RAM_A8: U2.30 U3.33 | length 14.4
  Top Layer w0.152: U3.33@59.65,140.793 61.57,140.793 63.363,142.586 U2.30@73.27,142.586
RAM_A9: U2.29 U3.34 | length 14.2
  Top Layer w0.152: U3.34@59.65,141.593 61.735,141.593 63.17,143.027 73.211,143.027 U2.29@73.27,143.086
RAM_A10: U2.6 U3.22 | length 43.1
  Top Layer w0.152: U3.22@48.35,140.793 50.829,140.793 55.829,145.793 55.829,158.239 57.305,159.715 62.358,159.715 68.555,153.518 70.618,153.518 71.686,154.586 U2.6@73.27,154.586
RAM_A11: U2.27 U3.35 | length 14.5
  Top Layer w0.152: U3.35@59.65,142.393 60.656,142.393 62.535,144.272 71.882,144.272 72.068,144.086 U2.27@73.27,144.086
RAM_A12: U2.26 U3.36 | length 14.2
  Top Layer w0.152: U3.36@59.65,143.193 60.668,143.193 62.061,144.586 U2.26@73.27,144.586
RAM_BA0: U2.2 U3.20 | length 41.2
  Top Layer w0.152: U3.20@48.35,142.393 51.567,142.393 55.22,146.046 55.22,158.492 57.053,160.325 62.764,160.325 66.13,156.959 71.895,156.959 72.268,156.586 U2.2@73.27,156.586
RAM_BA1: U2.5 U3.21 | length 42.9
  Top Layer w0.152: U3.21@48.35,141.593 51.198,141.593 55.524,145.919 55.524,158.365 57.179,160.02 62.484,160.02 68.682,153.822 70.491,153.822 71.755,155.086 U2.5@73.27,155.086
RAM_CKE: U2.56 U3.37 | length 34
  Top Layer w0.152: v1(57.937,143.764) 58.166,143.993 U3.37@59.65,143.993 ; v1(84.328,135.89) 84.328,136.011 84.57,136.253 U2.56@84.57,137.786
  Bottom Layer w0.152: v1(57.937,143.764) 66.421,135.28 68.124,135.28 68.708,135.865 84.303,135.865 v1(84.328,135.89)
RAM_CLK: NT1.1 U2.24 | length 2.6
  Top Layer w0.152: NT1.1@70.7,145.586 U2.24@73.27,145.586
RAM_D0: U2.131 U3.2 | length 44.2
  Top Layer w0.152: U3.2@48.35,156.793 50.113,156.793 51.257,157.937 51.257,160.133 57.611,166.487 78.263,166.487 80.264,164.486 80.264,161.163 81.57,159.857 U2.131@81.57,158.886
RAM_D1: U2.132 U3.4 | length 44.6
  Top Layer w0.152: U3.4@48.35,155.193 49.809,155.193 51.562,156.946 51.562,160.007 57.738,166.182 78.137,166.182 79.959,164.36 79.959,161.037 81.07,159.926 U2.132@81.07,158.886
RAM_D2: U2.133 U3.5 | length 44.2
  Top Layer w0.152: U3.5@48.35,154.393 49.44,154.393 51.867,156.82 51.867,159.88 57.864,165.877 77.963,165.877 79.654,164.186 79.654,160.91 80.57,159.995 U2.133@80.57,158.886
RAM_D3: U2.134 U3.7 | length 44.9
  Top Layer w0.152: U3.7@48.35,152.793 49.644,152.793 52.172,155.32 52.172,159.754 57.99,165.573 77.759,165.573 79.35,163.982 79.35,160.711 80.07,159.991 U2.134@80.07,158.886
RAM_D4: U2.137 U3.8 | length 41.5
  Top Layer w0.152: U3.8@48.35,151.993 49.275,151.993 52.476,155.194 52.476,159.628 58.116,165.268 73.111,165.268 78.57,159.809 U2.137@78.57,158.886